# Altium PCB heath_monitor.PcbDoc
Units mil, origin at the board's own origin, x right, y up, seen from the top; angles counter-clockwise.
Board outline 1585.03 x 2405.03 mil, 2 copper layers (Top Layer, Bottom Layer); 9 components, 8 nets, 63 pads, 1 vias.
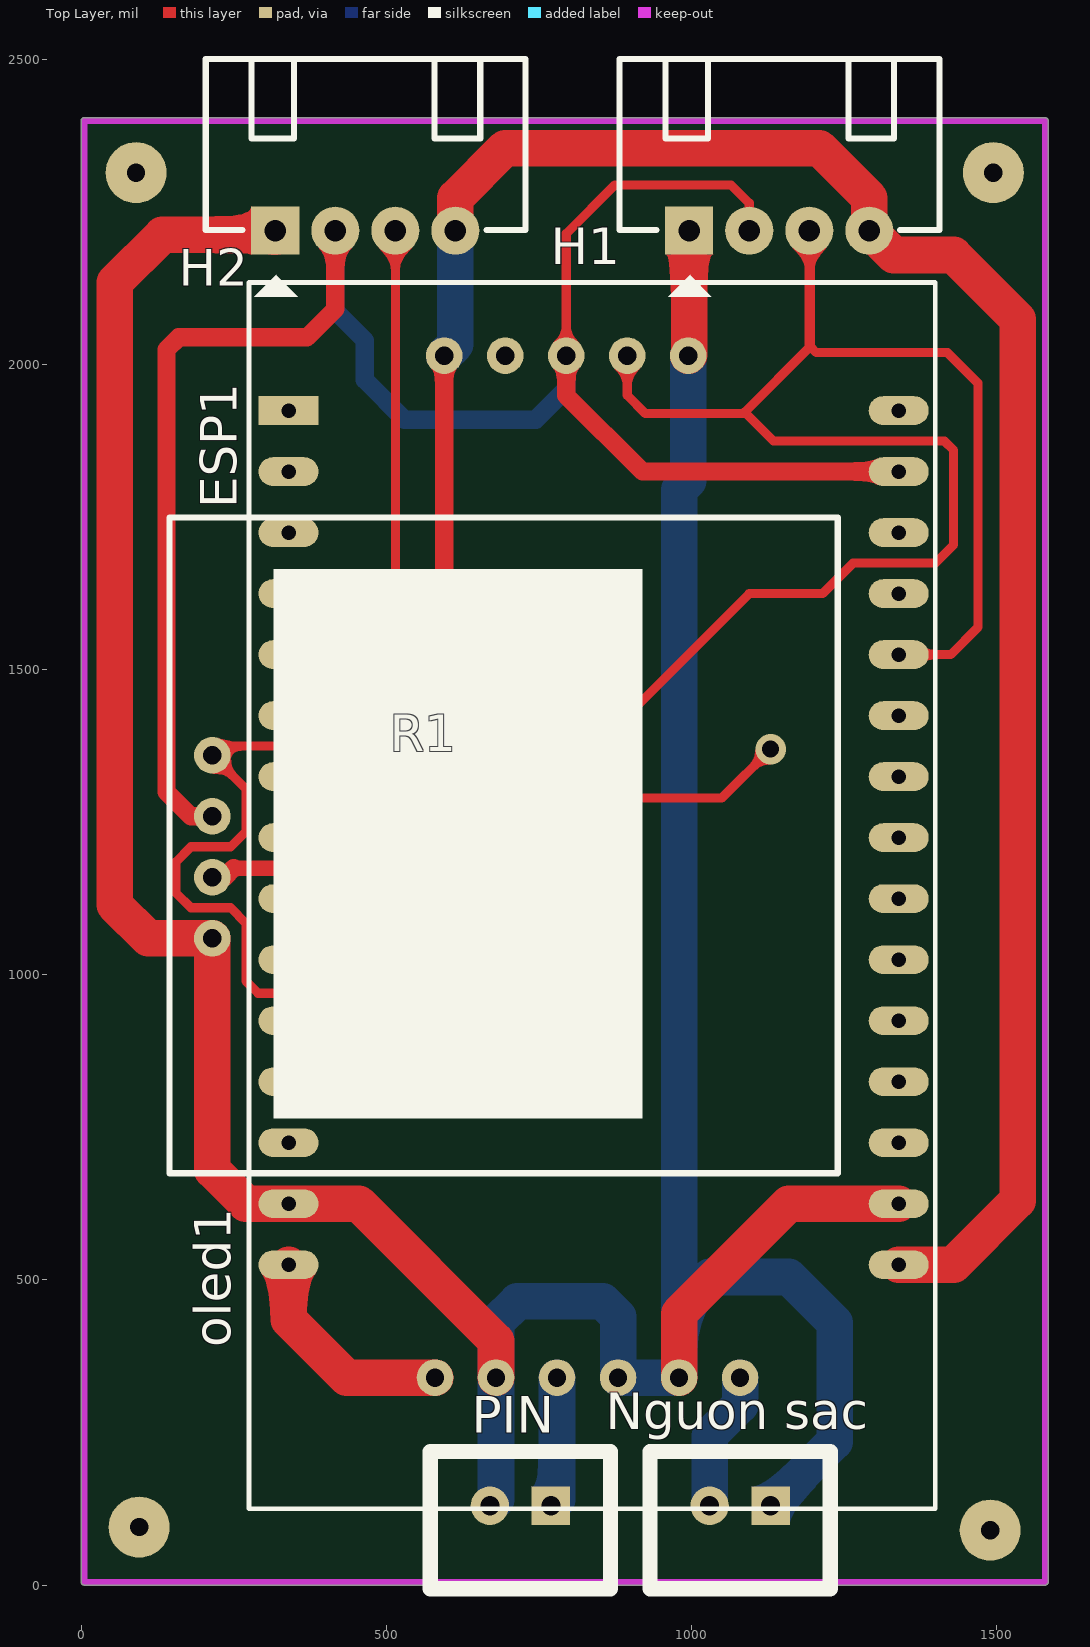
[diagram p0: Top Layer view]
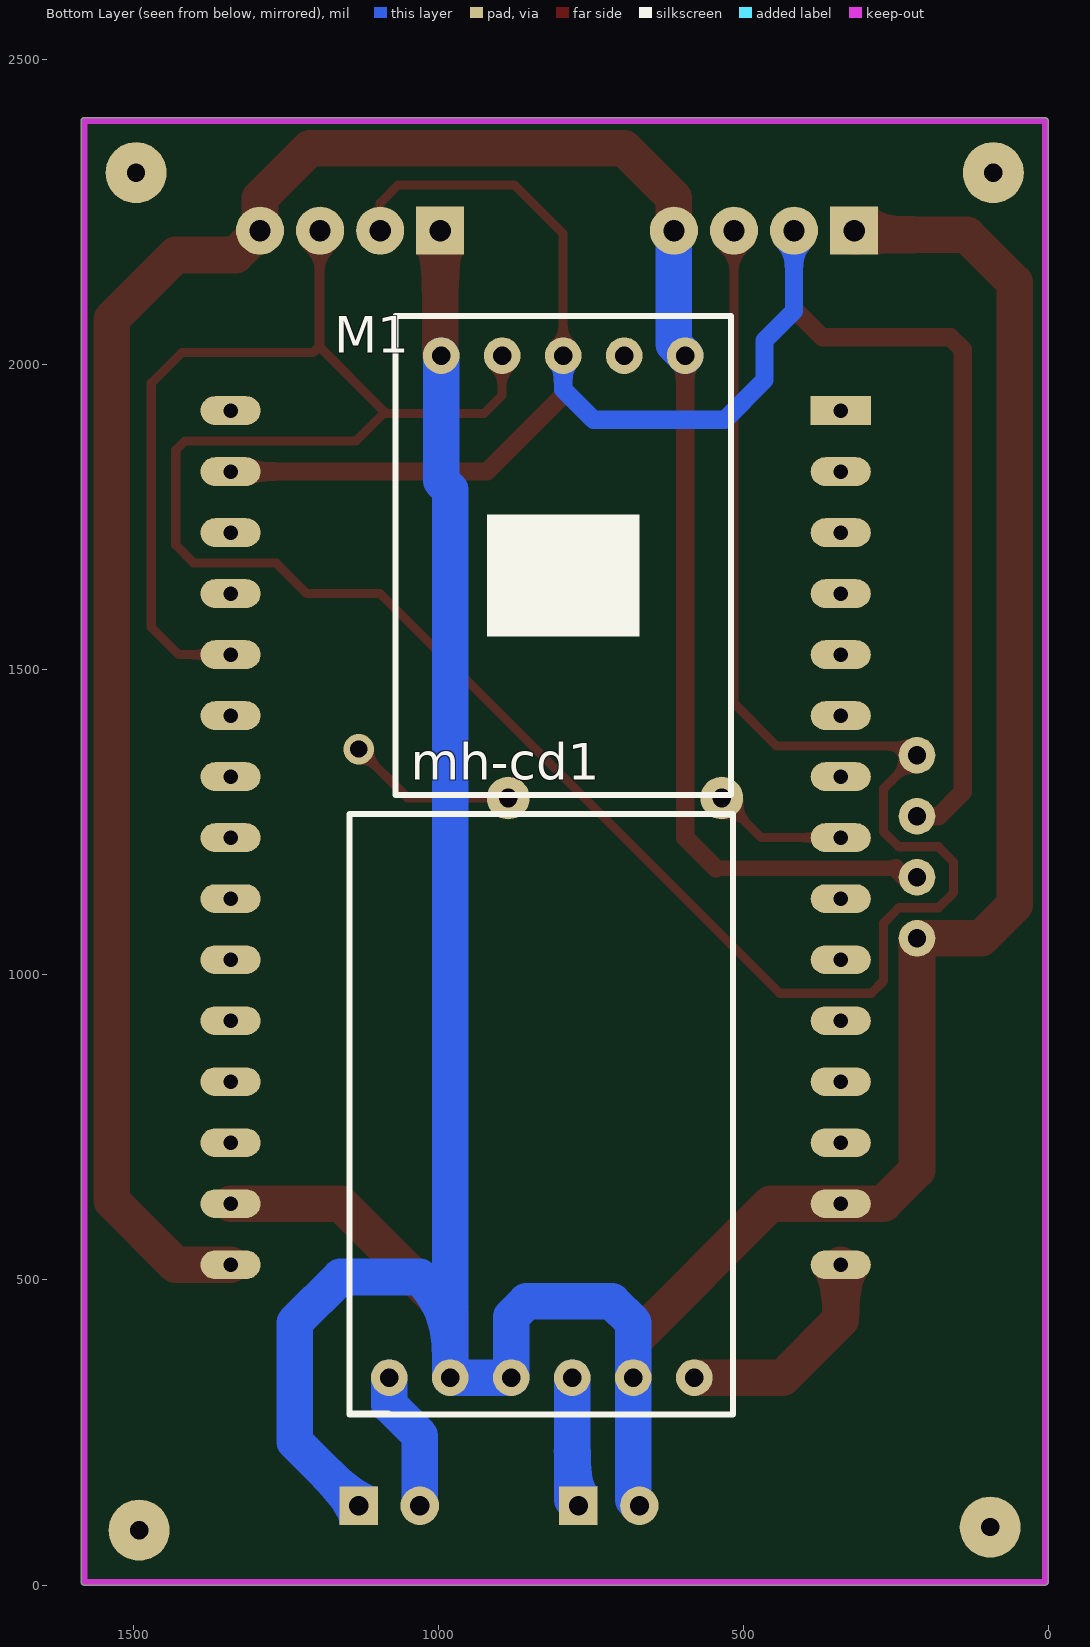
[diagram p1: Bottom Layer view, seen from below]
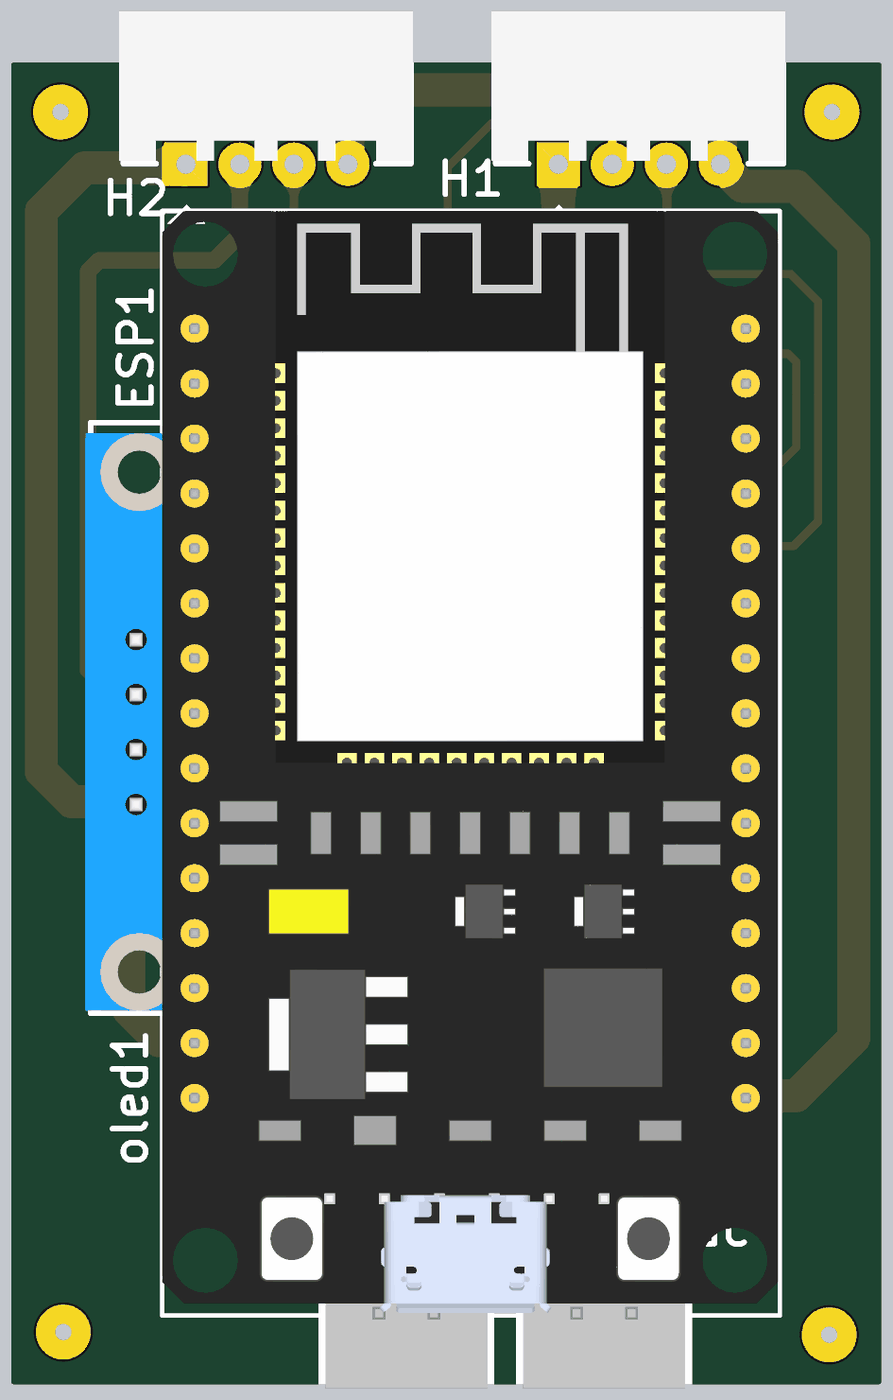
[diagram p2: 3D render of the assembled board from above, using the file's embedded part models]

## Layer stack, top to bottom
Top Solder: solder mask 0.4, Solder Resist, Dk 3.5
Top Layer: signal copper 1.4
Dielectric 1: dielectric 12.6, FR-4, Dk 4.8
Bottom Layer: signal copper 1.4
Bottom Solder: solder mask 0.4, Solder Resist, Dk 3.5

## Board outline
-0.02,5 ccw(c5,5) 5,-0.02 1580,-0.02 ccw(c1580,5) 1585.02,5 1585.02,2400 ccw(c1580,2400) 1580,2405.01 5,2405.01 ccw(c5,2400) -0.02,2400

## Design rules (kind name [scope] priority, off if disabled: settings)
Clearance [All] p1: gap=10 ignorepadtopadclearanceinfootprint=FALSE
PolygonConnect [All] p1: connectstyle=Relief reliefconductorwidth=10 reliefentries=4 polygonreliefangle="90 Angle" airgapwidth=10
RoutingVias [All] p1: holewidth=20 width=35 viastyle="Through Hole" minholewidth=15 minwidth=25 maxholewidth=28 maxwidth=50
SolderMaskExpansion [All] p1: expansion=4
Width [All] p1: maxlimit=60 minlimit=15 preferedwidth=30
30 further rules are at their usual default settings.

## Classes and differential pairs
component class heath_monitor: ESP1 H1 h2 H3 mh-cd1 "Nguon sac" PIN R1

## Components (designator, comment, footprint, x,y, rotation, side; value= is the part's Value field where it differs from the comment)
ESP1 "ESP32 DEVKIT" "ESP32 WROOM 32 KIT" 340,1925 r0 top
H1 "" "Header 4P DC 2.54" 997.57,2221 r90 top
H2 "" "Header 4P DC 2.54" 319.15,2221 r90 top (schematic designator h2)
M1 "max30205" max30205 520,2080 r0 bottom
mh-cd1 "mh-cd42" mh-cd42 1080,340 r90 bottom
"Nguon sac" "" XH2.54M-2 1130,130 r180 top
oled1 "oled 0.96inch" "oled 0x96inch" 1240,675 r90 top
PIN "" XH2.54M-2 770,130 r180 top
R1 "1k" R1/4W 885,1290 r180 top value="R1/4W - 1K"

## Footprints (in the part's own frame and the unit in brackets; to place one, negate y for a bottom-side part, rotate by r counter-clockwise, add the part's x,y. Pads: shape width x height; smd on the part's side, far side on the other; paste and mask are expansions set on the pad)
"ESP32 WROOM 32 KIT" [mm]
  rect 2.5x1.2 hole 0.6: 1(0,0)
  oval 2.5x1.2 hole 0.6: 2(0,-2.54) 3(0,-5.08) 4(0,-7.62) 5(0,-10.16) 6(0,-12.7) 7(0,-15.24) 8(0,-17.78) 9(0,-20.32) 10(0,-22.86) 11(0,-25.4) 12(0,-27.94) 13(0,-30.48) 14(0,-33.02) 15(0,-35.56) 16(25.4,-35.56) 17(25.4,-33.02) 18(25.4,-30.48) 19(25.4,-27.94) 20(25.4,-25.4) 21(25.4,-22.86) 22(25.4,-20.32) 23(25.4,-17.78) 24(25.4,-15.24) 25(25.4,-12.7) 26(25.4,-10.16) 27(25.4,-7.62) 28(25.4,-5.08) 29(25.4,-2.54) 30(25.4,0)
  silkscreen extent -1.65,-45.72 26.92,5.33, body extent -1.65,-45.6 26.85,5.33, height 10.49
"Header 4P DC 2.54" [mil]
  rect 78.74x78.74 hole 35: 1(-1,1)
  round 78.74 hole 35: 2(-1,-97.43) 3(-1,-195.85) 4(-1,-294.28)
  silkscreen extent -110,-409 280,115, body extent 5,-413 278,123, height 290
max30205 [mil]
  round 60 hole 30: 1(75,65) 2(175,65) 3(275,65) 4(375,65) 5(475,65)
  silkscreen extent 0,0 550,785, body extent -5,-5 555,790, height 197
mh-cd42 [mil]
  round 60 hole 30: 1(0,-500) 2(0,-400) 3(0,-300) 4(0,-200) 5(0,-100) 6(0,0)
  silkscreen extent -60,-564 924,65, body extent -54,-565 931,65, height 177
"oled 0x96inch" [mil]
  round 60 hole 30: 1(385,1025) 2(485,1025) 3(585,1025) 4(685,1025)
  silkscreen extent 0,0 1075,1095, body extent 4,8 1056,1105, height 215
R1/4W [mil] "R 1/4W, 2 Pin, 350mil"
  round 70 hole 31: 1(0,0) 2(350,0)
  silkscreen extent 48,-38 302,38, body extent -40,-47 386,47, height 111
XH2.54M-2 [mm]
  rect 1.6x1.6 hole 0.8: 1(0,0)
  round 1.6 hole 0.8: 2(2.54,0)
  silkscreen extent -2.48,-2.26 5.02,3.46, body extent -2.48,-2.26 5.02,3.48, height 6.91

## Part data
ESP1: library part "ESP32 WROOM 32 KIT"
H1 H2: library part "Header 4P 2.54 Duc Cong", "C?m", Chung_Loai=C?m, Don_Vi=Con, Ma_Hang=MH001310, Ten_Linh_Kien="Header 4P XH2.54-4P Ð?c Cong"
"Nguon sac" PIN: library part "Header 2P 2.54 Duc Thang", "C?m", Chung_Loai=C?m, Don_Vi=Con, Ma_Hang=MH001283, Ten_Linh_Kien="Header 2P XH2.54-2P Ð?c Th?ng"
R1: library part R1/4W, "Resistor 1/4W"
M1: Giá=178.000, M? hàng=AM-057

## Free pads (board coordinates)
  round 100 hole 30: 2(90,2315) 2(95,95) 2(1490,90) 2(1495,2315)

## Via types
v1: diameter 50, hole 28, Top Layer to Bottom Layer, 1 vias

## Nets (pads, with @x,y where several pads share a name; then routed paths per layer and width w, separated by ;. In a path a pad name is that pad's centre, name@x,y a point inside that pad or via, vN(x,y) a via of type N, cw(c..) or ccw(c..) an arc to the next point about the centre after c; other vN are vias at no path point)
3.3V: ESP1.16 H1.4 H2.4 M1.1 oled1.2 | length 4252.6
  Top Layer w25: 250,1175 545,1175
  Top Layer w30: oled1.2 235,1160 250,1175 ; 545,1175 595,1225 M1.1
  Top Layer w60: H2.4 613.43,2273.43 695,2355 1210,2355 1291.85,2273.15 H1.4 1331.85,2180 1430,2180 1535,2075 1535,630 1430,525 ESP1.16
  Bottom Layer w10: oled1.2 oled1.2@215,1163.62
  Bottom Layer w60: M1.1 613.43,2033.43 H2.4
5V: ESP1.15 mh-cd1.1 | length 369.4
  Top Layer w60: ESP1.15 340,435 435,340 mh-cd1.1
BAT: mh-cd1.3 PIN.1 | length 214.1
  Bottom Layer w60: PIN.1 780,140 mh-cd1.3
GND: "Nguon sac.1" ESP1.14 ESP1.17 H1.1 H2.1 M1.5 mh-cd1.2 mh-cd1.4 mh-cd1.5 oled1.1 PIN.2 | length 6354.7
  Top Layer w60: H2.1@315,2210 318.15,2210 H2.1@318.15,2213.15 ; mh-cd1.2 680,400 455,625 ESP1.14 270,625 215,680 oled1.1 110,1060 55,1115 55,2135 133.15,2213.15 H2.1@318.15,2213.15 ; mh-cd1.5 980,445 1160,625 ESP1.17 ; M1.5 996.57,2016.57 H1.1 ; H2.1@318.15,2213.15 325,2220 H2.1 H2.1@318.15,2213.15
  Bottom Layer w60: PIN.2 680,140 mh-cd1.2 680,430 715,465 855,465 880,440 mh-cd1.4 mh-cd1.5 980,455 ; M1.5 995,1810 980,1795 980,455 ; 1130,130 1235,235 1235,430 1160,505 1030,505 980,455
IN: "Nguon sac.2" mh-cd1.6 | length 230.7
  Bottom Layer w60: 1030,130 1030,245 1080,295 mh-cd1.6
NetESP1_8: ESP1.8 R1.2 | length 221.9
  Top Layer w15: ESP1.8 470,1225 R1.2
SCL: ESP1.29 H1.2 H2.2 M1.3 oled1.3 | length 3209.2
  Top Layer w15: M1.3 795,2215 875,2295 1065,2295 1095,2265 H1.2
  Top Layer w30: oled1.3 180,1260 140,1300 140,2025 160,2045 370,2045 416.57,2091.57 H2.2 ; M1.3 795,1950 920,1825 ESP1.29
  Bottom Layer w15: oled1.3 oled1.3@215,1270
  Bottom Layer w30: H2.2 416.57,2088.43 465,2040 465,1975 530,1910 745,1910 795,1960 M1.3
SDA: ESP1.26 H1.3 H2.3 M1.4 oled1.4 | length 5328.7
  Top Layer w10: oled1.4 oled1.4@215,1363.62
  Top Layer w15: oled1.4 270,1305 270,1235 245,1210 180,1210 155,1185 155,1135 180,1110 245,1110 270,1085 270,990 290,970 440,970 1095,1625 1215,1625 1265,1675 1400,1675 1430,1705 1430,1860 1415,1875 1135,1875 1090,1920 ; oled1.4@230,1375 445,1375 515,1445 H2.3 ; M1.4 895,1950 925,1920 1090,1920 ; ESP1.26 1425,1525 1470,1570 1470,1970 1420,2020 1205,2020 1195,2030 1195,2218.43 H1.3 1193.43,2028.43 1087.5,1922.5 1090,1920
  Bottom Layer w15: oled1.4 oled1.4@230,1375 ; H1.3 H1.3@1195,2220
pads on no net: ESP1.1 ESP1.2 ESP1.3 ESP1.4 ESP1.5 ESP1.6 ESP1.7 ESP1.9 ESP1.10 ESP1.11 ESP1.12 ESP1.13 ESP1.18 ESP1.19 ESP1.20 ESP1.21 ESP1.22 ESP1.23 ESP1.24 ESP1.25 ESP1.27 ESP1.28 ESP1.30 M1.2 R1.1
copper on no net: | length 278.1
  Top Layer w15: 885,1290 1050,1290 v1(1130,1370)

## Keep-outs
Keep-Out Layer:
  lines w10: 5,5 5,2400 1580,2400 1580,5 5,5